# EAGLE board MP_PSU (EAGLE 9.7.0)
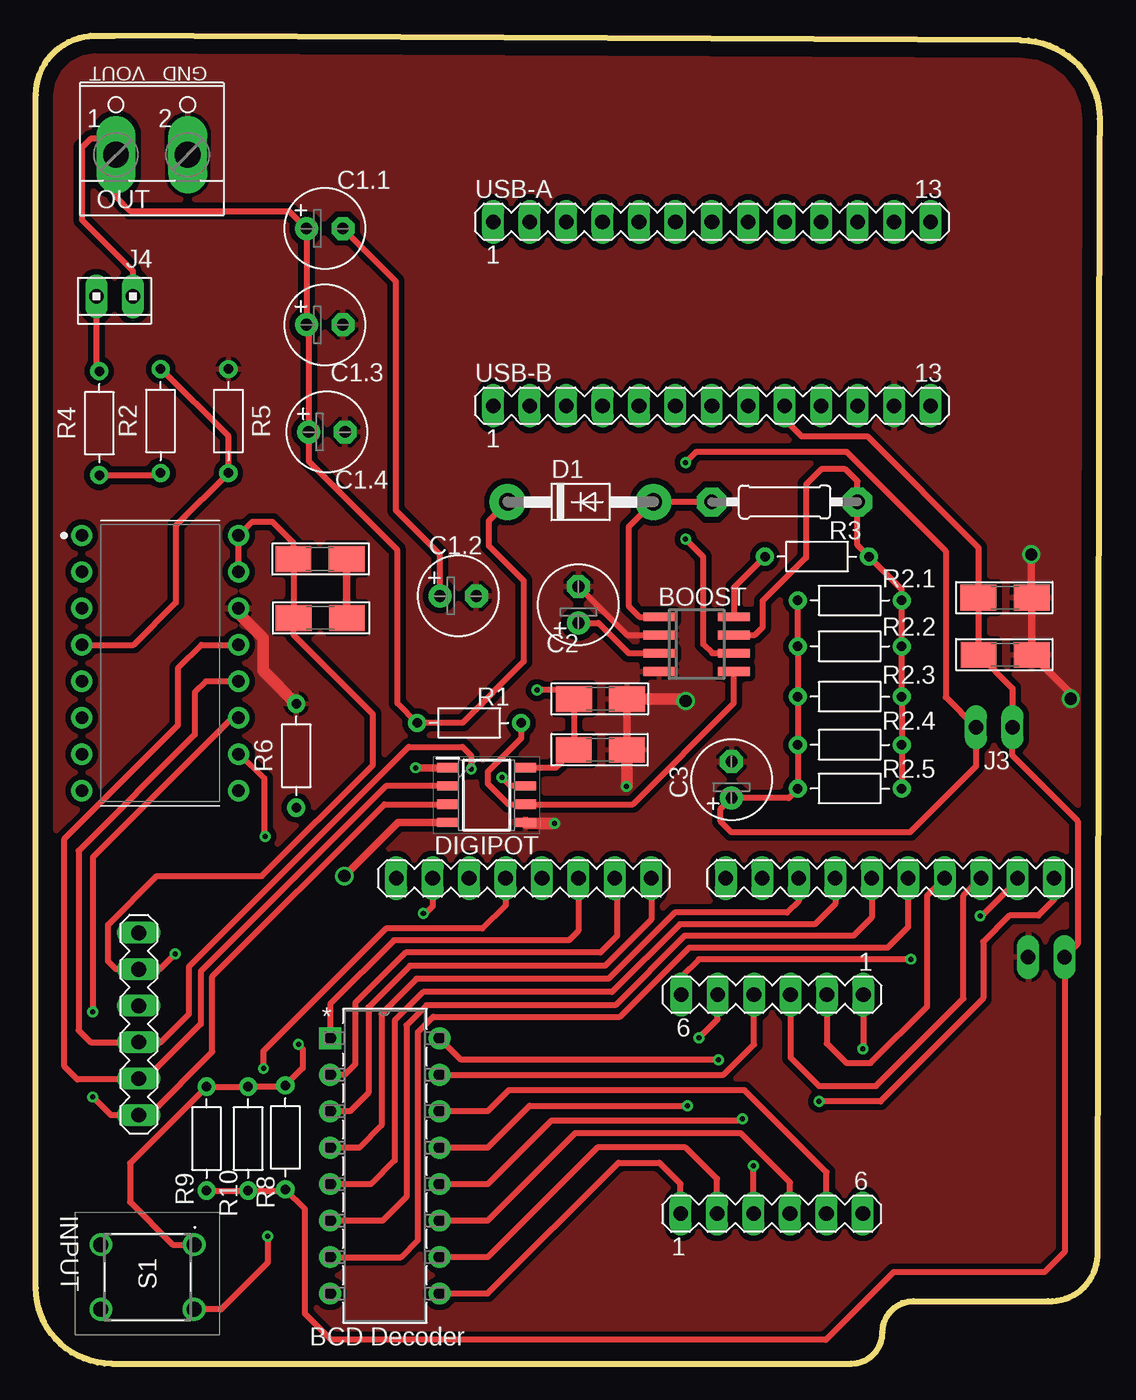
[diagram p0: board, top side]
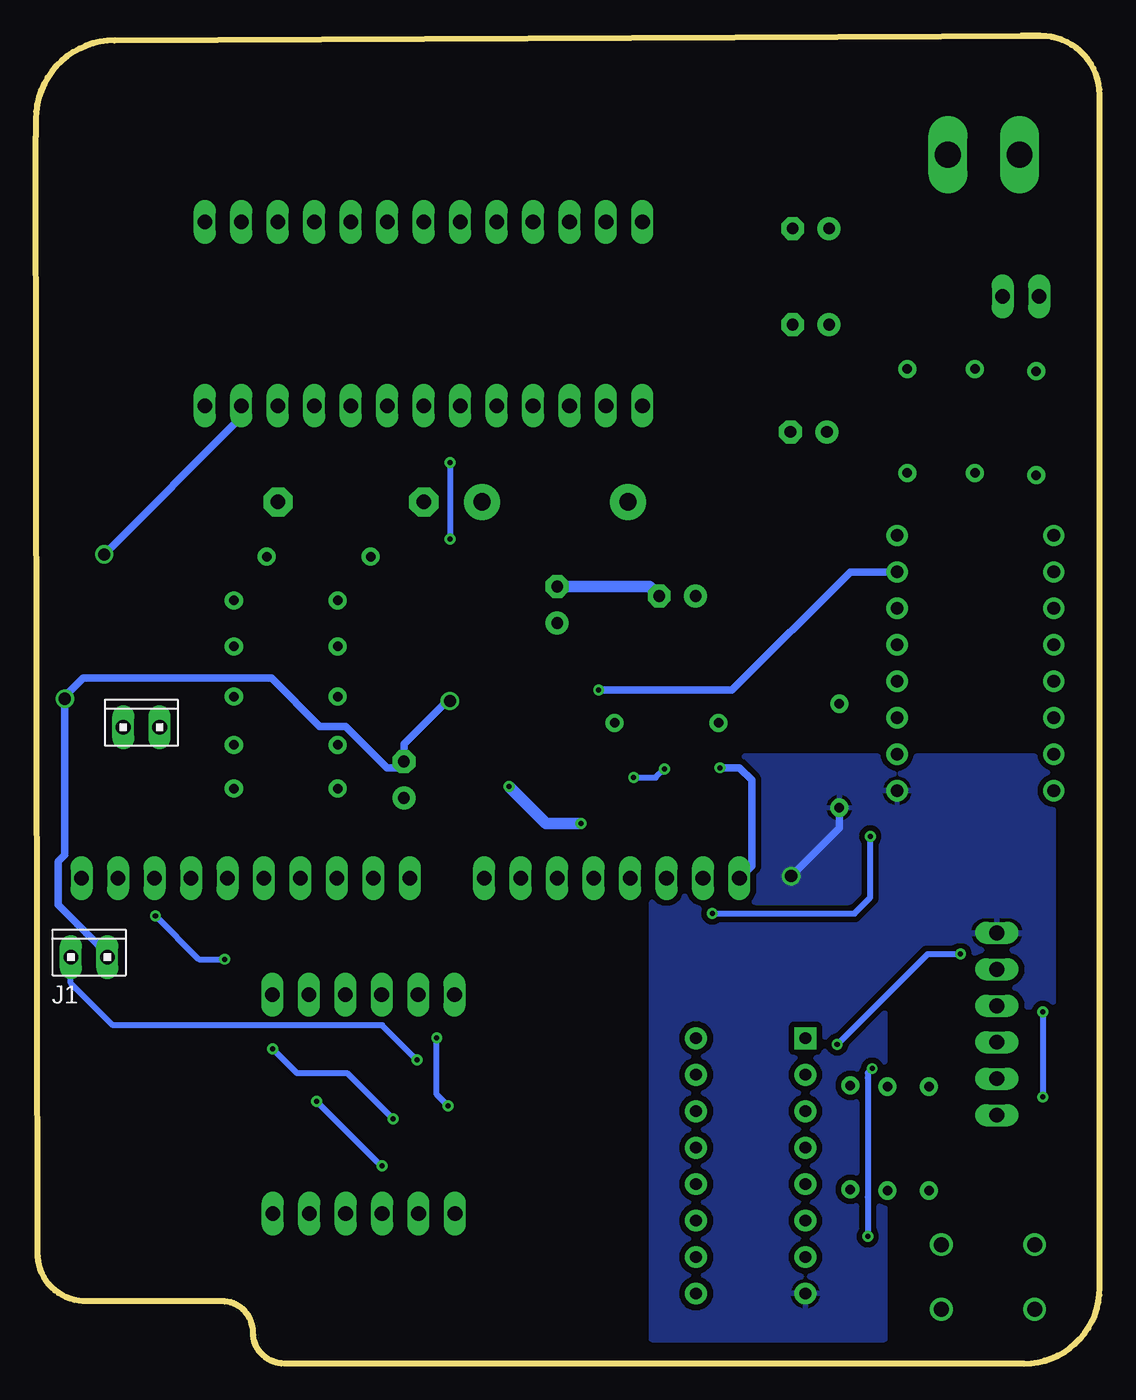
[diagram p1: board, bottom side, seen from below]

Size 74.1 x 92.48 mm. Coordinates in mm from the lower left corner, seen from the top.
Outline: 58.97,2.18 58.97,2.86
Outline: 73.96,7.49 arc-90 70.51,4.35
Outline: 70.51,4.35 60.28,4.35
Outline: 3.81,92.48 68.63,92.18 arc-90 74.1,86.7 74.1,85.49 73.96,7.49
Outline: 58.97,2.18 arc-90 61.15,4.35 70.51,4.35
Outline: 70.51,4.35 arc90 73.96,7.49
Outline: 58.97,2.18 arc-90 56.8,0 5.27,0 arc-90 0,5.27 0,88.37 arc-90 4.11,92.48 5.49,92.48
Copper layers (1*16): Top / Bottom
Stack-up Default Layer Stack: Top User Defined 0.035mm / Dielectric-1 User Defined 1.5mm / Bottom User Defined 0.035mm
Design rules "default *": minimum track width 16mil, minimum drill 0.02031875mm, track to track 16mil, track to pad 16mil, pad to pad 16mil, via to via 16mil, smd to smd 16mil, copper to edge 40mil, drill to drill 6mil, minimum pad ring 10mil, minimum via ring 8mil, stop-mask expansion 4mil, vias tented up to drill 0mil, thermal gap 10mil

## Footprints (pad centres in the part's own frame; a part is rotated, then mirrored left to right if it is on the bottom)
DIP1092W56P254L1905H432Q16B = drill 0.877 pad 1.477: 1 -5.46,8.89; 2 -5.46,6.35; 3 -5.46,3.81; 4 -5.46,1.27; 5 -5.46,-1.27; 6 -5.46,-3.81; 7 -5.46,-6.35; 8 -5.46,-8.89; 9 5.46,-8.89; 10 5.46,-6.35; 11 5.46,-3.81; 12 5.46,-1.27; 13 5.46,1.27; 14 5.46,3.81; 15 5.46,6.35; 16 5.46,8.89
SOIC8 = smd 0.6 x 2.2: 1 -1.905,-2.6; 2 -0.635,-2.6; 3 0.635,-2.6; 4 1.905,-2.6; 5 1.905,2.6; 6 0.635,2.6; 7 -0.635,2.6; 8 -1.905,2.6
E2,5-6 = drill 0.813 pad 1.6: + -1.27,0 | drill 0.813 pad 1.6 octagon: - 1.27,0
DO41-10 = drill 1.2 pad 2.5: A 5.08,0; C -5.08,0
C1206 = smd 2.5 x 1.8: 1 -1.85,0; 2 1.85,0
SOIC127P600X175-8N = smd 1.5 x 0.65: 1 -2.7,1.905; 2 -2.7,0.635; 3 -2.7,-0.635; 4 -2.7,-1.905; 5 2.7,-1.905; 6 2.7,-0.635; 7 2.7,0.635; 8 2.7,1.905
10X02MTA = drill 1.016 long: 1 1.27,0; 2 -1.27,0
MA08-1 = drill 1.016 long: 1 -8.89,0; 2 -6.35,0; 3 -3.81,0; 4 -1.27,0; 5 1.27,0; 6 3.81,0; 7 6.35,0; 8 8.89,0
MA10-1 = drill 1.016 long: 1 -11.43,0; 2 -8.89,0; 3 -6.35,0; 4 -3.81,0; 5 -1.27,0; 6 1.27,0; 7 3.81,0; 8 6.35,0; 9 8.89,0; 10 11.43,0
0207/10 = drill 1.016 pad 2.032 octagon: 1 -5.08,0; 2 5.08,0
W237-102 = drill 1.8 long: 1 -2.5,-1.27; 2 2.5,-1.27
RESAD724W46L381D178B = drill 0.66 pad 1.26: 1 -3.62,0; 2 3.62,0
TL1105AF160Q = drill 1.05 pad 1.575: 1 0,0; 2 0,-6.5; 3 4.5,0; 4 4.5,-6.5
MA06-1 = drill 1.016 long: 1 -6.35,0; 2 -3.81,0; 3 -1.27,0; 4 1.27,0; 5 3.81,0; 6 6.35,0
DIP16_300 = drill 0.813 pad 1.524 square: 1 -7.62,17.78 | drill 0.813 pad 1.524: 2 -7.62,15.24; 3 -7.62,12.7; 4 -7.62,10.16; 5 -7.62,7.62; 6 -7.62,5.08; 7 -7.62,2.54; 8 -7.62,0; 9 0,0; 10 0,2.54; 11 0,5.08; 12 0,7.62; 13 0,10.16; 14 0,12.7; 15 0,15.24; 16 0,17.78
MA13-1 = drill 1.016 long: 1 -15.24,0; 2 -12.7,0; 3 -10.16,0; 4 -7.62,0; 5 -5.08,0; 6 -2.54,0; 7 0,0; 8 2.54,0; 9 5.08,0; 10 7.62,0; 11 10.16,0; 12 12.7,0; 13 15.24,0

## Placement (x,y rotation side)
ADC  MCP3008  [DIP1092W56P254L1905H432Q16B]  8.66,48.8 0 top
BOOST  MC34063AD  [SOIC8]  46.02,50.11 270 top
C1.1  470uF  [E2,5-6]  20.12,79.07 0 top
C1.2  220uF  [E2,5-6]  29.41,53.47 0 top
C1.3  220uF  [E2,5-6]  20.12,72.36 0 top
C1.4  10uF  [E2,5-6]  20.27,64.9 0 top
C2  300pF  [E2,5-6]  37.8,52.86 90 top
C3  100uF  [E2,5-6]  48.46,40.67 90 top
D1  1N5819  [DO41-10]  37.95,60.02 0 top
DC1  0.1uF  [C1206]  19.81,51.94 0 top
DC2  0.1uF  [C1206]  19.78,56.04 0 top
DC3  0.1uF  [C1206]  39.32,46.3 180 top
DC5  0.1uF  [C1206]  67.51,53.35 180 top
DC6  0.1uF  [C1206]  67.52,49.38 180 top
DC-1206  0.1uF  [C1206]  39.32,42.76 180 top
DIGIPOT  MCP4162-104E_SN  [SOIC127P600X175-8N]  31.39,39.6 0 top
J1  EXPWR  [10X02MTA]  70.4,28.32 0 bottom
J2  p0  [MA08-1]  33.99,33.81 0 top
J3  [10X02MTA]  66.75,44.32 0 bottom
J4  [10X02MTA]  5.49,74.35 180 top
J6  p3  [MA10-1]  59.49,33.82 180 top
L1  18uH  [0207/10]  52.16,60.02 0 top
OUT  [W237-102]  8.08,85.47 0 top
R1  4.7k  [RESAD724W46L381D178B]  30.18,44.63 0 top
R2  330  [RESAD724W46L381D178B]  8.69,65.66 90 top
R2.1  1  [RESAD724W46L381D178B]  56.69,53.16 0 top
R2.2  1  [RESAD724W46L381D178B]  56.69,49.96 0 top
R2.3  1  [RESAD724W46L381D178B]  56.69,46.46 0 top
R2.4  1  [RESAD724W46L381D178B]  56.69,43.1 0 top
R2.5  1  [RESAD724W46L381D178B]  56.69,40.06 0 top
R3  180  [RESAD724W46L381D178B]  54.41,56.21 0 top
R4  3.3k  [RESAD724W46L381D178B]  4.42,65.51 90 top
R5  1k  [RESAD724W46L381D178B]  13.41,65.66 270 top
R6  [RESAD724W46L381D178B]  18.14,42.34 90 top
R8  1  [RESAD724W46L381D178B]  17.38,15.76 90 top
R9  10  [RESAD724W46L381D178B]  11.89,15.67 90 top
R10  10  [RESAD724W46L381D178B]  14.78,15.67 90 top
S1  TL1105AF160Q  [TL1105AF160Q]  11.03,8.28 270 top
SPI  spi  [MA06-1]  7.16,23.65 90 top
SV1  [MA06-1]  51.29,25.69 180 top
SV2  [MA06-1]  51.26,10.44 0 top
U1  BCD Decoder  [DIP16_300]  28.12,4.88 0 top
USB-A  [MA13-1]  47.09,79.53 0 top
USB-B  [MA13-1]  47.09,66.73 0 top

## Library data of the parts
ADC = IC_Data-Conversion; CATEGORY: IC_Data-Conversion; DESCRIPTION: IC ADC 10BIT SAR 16DIP; MANUFACTURER: Microchip Technology; MPN: MCP3008-I/P; OPERATINGTEMP: -40 to +85°C; PART_STATUS: Active; ROHS_COMPLIANT: Compliant; SUB-CATEGORY: A/D Converter
BOOST = mc34063
C1.1-C1.4 C2 C3 D1 DC1-DC3 DC5 DC6 DC-1206 L1 = BASIC_Components
DIGIPOT = MCP4162-104E_SN; DESCRIPTION: Digital Potentiometer 256 Step 100kOhm; HEIGHT: 1.75mm; MANUFACTURER_NAME: Microchip; MANUFACTURER_PART_NUMBER: MCP4162-104E/SN; MOUSER_PART_NUMBER: 579-MCP4162-104E/SN; MOUSER_PRICE-STOCK: https://www.mouser.co.uk/ProductDetail/Microchip-Technology-Atmel/MCP4162-104E-SN?qs=hH%252BOa0VZEiAyFbEnDIqKaA%3D%3D
J1 J3 J4 = con-amp
J2 J6 SPI = con-lstb; OC_FARNELL: unknown; OC_NEWARK: unknown
OUT = BASIC_Components; MPN: 237-102; OC_FARNELL: unknown; OC_NEWARK: 70K9898
R1 R2 R2.1-R2.5 R3-R6 R8-R10 = Resistor; CATEGORY: Resistor; SUB-CATEGORY: Fixed
S1 = TL1105AF160Q; DESCRIPTION: E-SWITCH - TL1105AF160Q - SWITCH, TACTILE SPST, 50mA, THROUGH HOLE; HEIGHT: 6.8mm; MANUFACTURER_NAME: E-Switch; MANUFACTURER_PART_NUMBER: TL1105AF160Q; MOUSER_PART_NUMBER: 612-TL1105A; MOUSER_PRICE-STOCK: https://www.mouser.co.uk/ProductDetail/E-Switch/TL1105AF160Q?qs=YXf4ACKMM4wdc4witUH7eQ%3D%3D
SV1 SV2 USB-A USB-B = con-lstb
U1 = 2023-03-22_10-19-04_Library; COPYRIGHT: Copyright (C) 2023 Ultra Librarian. All rights reserved.; MANUFACTURER_PART_NUMBER: SN7448N; MFR_NAME: Texas Instruments

## Nets
B-VIN: BOOST.6 C3.+ J3.1 R2.1.1 R2.2.1 R2.3.1 R2.4.1 R2.5.1
DCD-A: J6.5 U1.7
DCD-B: J2.6 U1.1
DCD-C: J2.7 U1.2
DCD-D: J6.6 U1.6
DCD-LT: J2.8 U1.3
DCD-RBI: J6.7 U1.5
DCD-RBO: J6.8 U1.4
DGND: ADC.9 DIGIPOT.4 R6.1 SPI.6 U1.8
DIGIPOT: BOOST.5 DIGIPOT.6 R1.2
GND: ADC.14 BOOST.2 BOOST.4 C1.2.- C1.3.- C1.4.- C2.- C3.- DC3.1 DC5.1 DC6.1 DC-1206.1 DIGIPOT.5 J1.1 OUT.2 R5.1 R6.2 USB-B.12
GND1: DC1.2 DC2.2
INT0: J2.4 S1.3
LED-1: J6.2 SV1.6
LED-2: J6.3 SV1.3
LED-3: J6.4 SV1.2
LED-A: SV1.5 U1.13
LED-B: SV1.1 U1.12
LED-C: SV2.4 U1.11
LED-D: SV2.2 U1.10
LED-DP: J6.1 SV2.3
LED-E: SV2.1 U1.9
LED-F: SV1.4 U1.15
LED-G: SV2.5 U1.14
MISO: ADC.12 DIGIPOT.7 SPI.3
MOSI: ADC.11 DIGIPOT.3 SPI.1
N$1: BOOST.7 L1.2 R2.1.2 R2.2.2 R2.3.2 R2.4.2 R2.5.2 R3.2
N$2: BOOST.8 R3.1
N$3: BOOST.1 D1.A L1.1
N$5: BOOST.3 C2.+
N$7: J4.1 R4.2
N$9: C1.1.- C1.2.+
N$10: R2.1 R4.1
N$11: ADC.4 R2.2 R5.2
SCK: ADC.13 DIGIPOT.2 SPI.2
SS: SPI.4
SS0: DIGIPOT.1 J2.1
SS1: ADC.10 J2.2
VDDR: ADC.15 ADC.16 DC1.1 DC2.1 DC3.2 DC-1206.2 DIGIPOT.8 R8.2 R9.2 R10.2 S1.1 SPI.5
VIN: DC5.2 DC6.2 J1.2 J3.2 R8.1 R9.1 R10.1 U1.16 USB-B.9
VOUT: C1.1.+ C1.3.+ C1.4.+ D1.C J4.2 OUT.1 R1.1

## Tracks (layer width: path | path; a pad name or v marks a point on that pad's centre or on a via)
B-VIN  (via drill 0.35)
  Top 0.406: R2.1.1 R2.2.1 R2.3.1 R2.4.1 R2.5.1 53.07,40.02 52.45,39.4 C3.+ 47.7,38.63 47.7,37.77 48.46,37.01 60.9,37.01 65.48,41.59 J3.1 63.38,46.42 63.38,56.61 56.47,63.53 46.02,63.53 v45.26,62.76 | BOOST.6 47.12,49.48 46.48,50.11 46.48,56.21 v45.26,57.43
  Bottom 0.406: v45.26,62.76 v45.26,57.43
DCD-A
  Top 0.406: U1.7 25.43,7.42 26.62,8.61 26.62,23.1 27.67,24.16 40.7,24.16 45.53,28.98 59.33,28.98 60.76,30.41 J6.5
DCD-B
  Top 0.406: J2.6 37.8,30.15 37.13,29.49 24.94,29.49 20.5,25.05 U1.1
DCD-C
  Top 0.406: J2.7 40.49,33.65 40.49,29.79 39.32,28.63 25.76,28.63 22.25,25.12 22.25,20.85 21.52,20.12 U1.2
DCD-D
  Top 0.406: J6.6 58.22,31.07 56.95,29.79 45.19,29.79 40.36,24.97 27.21,24.97 25.81,23.56 25.81,11.61 24.16,9.96 U1.6
DCD-LT
  Top 0.406: U1.3 21.87,17.58 23.16,18.87 23.16,24.82 26.06,27.71 39.66,27.71 42.88,30.93 J2.8
DCD-RBI
  Top 0.406: J6.7 55.68,32.03 54.25,30.61 44.85,30.61 40.13,25.88 26.97,25.88 24.99,23.9 24.99,14.15 23.35,12.5 U1.5
DCD-RBO
  Top 0.406: J6.8 53.14,32.24 52.32,31.42 44.52,31.42 39.89,26.8 26.52,26.8 24.08,24.36 24.08,16.59 22.53,15.04 U1.4
DGND  (via drill 0.85)
  Top 0.508: DIGIPOT.4 25.22,37.69 v21.49,33.96
  Bottom 0.508: v21.49,33.96 18.14,37.31 R6.1
  pour Bottom: 31.39,42.49 3.05,42.49 3.05,24.66 14.78,24.66 14.78,1.5 31.39,1.5
DIGIPOT
  Top 0.406: BOOST.5 48.62,46 41.58,38.96 DIGIPOT.6 32.92,38.96 31.47,40.41 31.47,41.23 33.8,43.55 R1.2
GND  (via drill 0.35, 0.85)
  Top 0.406: C2.- 41.17,50.75 BOOST.2
  Top 0.508: v72.09,46.3 72.09,46.66 DC6.1 DC5.1 69.34,53.37 v69.34,56.36 | DC-1206.1 DC3.1
  Top 0.813: 45.26,46.37 v45.26,46.15 45.12,46.3 DC3.1 | DC-1206.1 41.17,40.23 v41.15,40.21 | v36.12,37.62 34.17,37.62 DIGIPOT.5 | R6.2 15.82,48.28 15.82,50.56 14.12,52.26 ADC.14
  Bottom 0.508: J1.1 69.13,28.55 72.53,31.96 72.53,34.99 72.09,35.43 v72.09,46.3 72.09,46.46 70.79,47.75 57.68,47.75 54.33,44.39 52.54,44.39 49.62,41.48 48.92,41.48 C3.- 48.46,43.15 45.47,46.15 v45.26,46.15 | v69.34,56.36 59.79,65.91 USB-B.12
  Bottom 0.813: C2.- 31.36,54.14 C1.2.- | v41.15,40.21 38.56,37.62 v36.12,37.62
  pour Top: 57.03,0.31 57.35,0.38 57.66,0.51 57.95,0.69 58.2,0.9 58.42,1.16 58.59,1.44 58.72,1.75 58.8,2.08 58.83,2.41 58.98,2.41 59,2.7 59,2.7 59,2.7 59.07,2.98 59.07,2.98 59.07,2.98 59.18,3.24 59.18,3.24 59.33,3.49 59.33,3.49 59.33,3.49 59.51,3.71 59.51,3.71 59.73,3.89 59.73,3.89 59.73,3.89 59.73,3.89 59.98,4.04 60.24,4.15 60.24,4.15 60.24,4.15 60.52,4.22 60.52,4.22 60.52,4.22 60.81,4.24 70.1,4.24 70.64,4.28 71.17,4.38 71.68,4.56 72.16,4.79 72.61,5.09 73.01,5.45 73.37,5.85 73.67,6.3 73.91,6.78 74.08,7.29 74.18,7.82 74.22,8.36 74.22,86.39 74.18,87.1 74.05,87.81 73.83,88.49 73.54,89.15 73.17,89.76 72.72,90.33 72.22,90.83 71.65,91.28 71.04,91.65 70.38,91.94 69.7,92.16 68.99,92.29 68.28,92.33 4.11,92.33 3.56,92.29 3.01,92.18 2.48,92 1.98,91.76 1.52,91.45 1.1,91.08 0.73,90.66 0.42,90.2 0.17,89.69 -0.01,89.17 -0.12,88.62 -0.15,88.06 -0.15,86.44 -0.08,86.37 -0.04,86.34 -0.04,86.34 -0.04,86.34 -0.02,86.31 -0.02,86.31 -0.01,86.27 -0.01,86.27 -0.01,86.25 0,86.23 0,5.61 0.04,4.97 0.15,4.34 0.35,3.72 0.61,3.13 0.94,2.58 1.34,2.08 1.8,1.62 2.3,1.22 2.86,0.89 3.44,0.63 4.06,0.43 4.69,0.32 5.33,0.28 56.69,0.28
GND1
  Top 0.508: DC2.2 21.63,51.97 DC1.2
INT0  (via drill 0.35)
  Top 0.406: J2.4 32.72,31.93 31.09,30.3 24.38,30.3 15.85,21.77 v15.85,20.55 | v16.15,8.86 16.15,7.04 12.9,3.78 S1.3
  Bottom 0.406: v15.85,20.55 16.15,20.24 16.15,19.91 16.14,19.89 16.14,11.62 16.15,11.61 v16.15,8.86
LED-1  (via drill 0.35)
  Top 0.406: v60.96,28.17 46.18,28.17 44.94,26.93 SV1.6 | v65.78,31.18 65.9,31.18 68.38,33.66 J6.2
  Bottom 0.406: v65.78,31.18 62.76,28.17 v60.96,28.17
LED-2
  Top 0.406: SV1.3 52.56,21.33 54.56,19.33 58.52,19.33 64.62,25.43 64.62,32.6 J6.3
LED-3
  Top 0.406: SV1.2 55.1,22.29 56.46,20.93 58.14,20.93 62.08,24.87 62.08,32.6 J6.4
LED-A  (via drill 0.35)
  Top 0.406: U1.13 31.47,15.04 34.39,17.96 v45.39,17.96 | v46.18,22.68 47.48,23.99 SV1.5
  Bottom 0.406: v45.39,17.96 46.18,18.75 v46.18,22.68
LED-B  (via drill 0.35)
  Top 0.406: U1.12 31.47,12.5 35.91,16.94 49.12,16.94 v49.23,17.04 | SV1.1 57.64,21.95 v57.61,21.92
  Bottom 0.406: v57.61,21.92 55.93,20.24 52.43,20.24 v49.23,17.04
LED-C
  Top 0.406: U1.11 31.47,9.96 37.57,16.06 49.1,16.06 52.53,12.63 SV2.4
LED-D
  Top 0.406: U1.10 31.47,7.42 39.11,15.06 45.26,15.06 47.45,12.88 SV2.2
LED-DP  (via drill 0.35)
  Top 0.406: v54.56,18.26 58.83,18.26 65.99,25.43 65.99,29.39 67.82,31.22 69.84,31.22 70.92,32.3 J6.1 | SV2.3 v49.99,13.77
  Bottom 0.406: v54.56,18.26 50.07,13.77 v49.99,13.77
LED-E
  Top 0.406: U1.9 31.47,4.88 40.59,14 43.43,14 44.91,12.52 SV2.1
LED-F
  Top 0.406: U1.15 47.91,20.12 50.02,22.23 SV1.4
LED-G
  Top 0.406: SV2.5 55.07,13.33 49.37,19.03 32.93,19.03 31.47,17.58 U1.14
MISO  (via drill 0.35)
  Top 0.406: DIGIPOT.7 33.05,40.23 v32.46,40.82 | ADC.12 11.83,47.53 11.07,46.76 11.07,43.81 2.97,35.72 2.97,23.21 3.81,22.38 SPI.3 8.69,22.38 10.67,24.36 10.67,27.66 25.96,42.95 29.72,42.95 30.33,42.34 v30.33,41.43
  Bottom 0.406: v32.46,40.82 30.94,40.82 v30.33,41.43
MOSI  (via drill 0.35)
  Top 0.406: v3.96,18.57 5.23,17.3 SPI.1 7.88,17.3 12.29,21.72 12.29,26.98 24.27,38.96 DIGIPOT.3 | ADC.11 13.68,44.99 3.96,35.26 v3.96,24.51
  Bottom 0.406: v3.96,24.51 v3.96,18.57
N$1
  Top 0.406: R2.5.2 R2.4.2 R2.3.2 R2.2.2 R2.1.2 60.31,53.92 R3.2 57.24,57 L1.2 57.24,61.46 56.39,62.31 54.71,62.31 53.64,61.24 53.64,56.14 50.64,53.13 50.64,51.31 50.07,50.75 BOOST.7
N$2
  Top 0.406: R3.1 48.62,54.05 BOOST.8
N$3
  Top 0.406: L1.1 D1.A 41.29,58.28 41.29,52.78 42.05,52.02 BOOST.1
N$5
  Top 0.406: C2.+ 39.19,51.59 41.29,49.48 BOOST.3
N$7
  Top 0.406: J4.1 4.22,69.33 R4.2
N$9
  Top 0.406: C1.2.+ 28.14,56.36 25.08,59.42 25.08,75.37 C1.1.-
N$10
  Top 0.406: R4.1 8.53,61.89 R2.1
N$11
  Top 0.406: R2.2 8.72,69.28 13.41,64.59 R5.2 9.75,58.38 9.75,53.01 6.81,50.07 ADC.4
SCK
  Top 0.406: 7.11,19.79 2.9,19.79 1.98,20.7 1.98,36.55 9.91,44.48 9.91,48.44 11.53,50.07 ADC.13 | 7.11,19.79 SPI.2 | 7.11,19.79 7.62,19.79 11.48,23.65 11.48,27.32 24.39,40.23 DIGIPOT.2
SS0  (via drill 0.35)
  Top 0.508: v26.46,41.5 DIGIPOT.1
  Bottom 0.508: v26.46,41.5 25.08,41.5 24.23,40.65 24.23,34.67 J2.1
SS1  (via drill 0.35)
  Top 0.406: J2.2 27.64,31.85 27.14,31.36 v26.99,31.36 | ADC.10 14.24,42.45 15.92,40.77 15.92,36.78 v15.98,36.73
  Bottom 0.406: v26.99,31.36 17.08,31.36 15.98,32.46 v15.98,36.73
VDDR  (via drill 0.35)
  Top 0.406: DIGIPOT.8 36.21,41.5 DC-1206.2 DC3.2 36.86,46.91 v34.9,46.91 | ADC.15 ADC.16 15.08,58.65 16.46,58.65 17.93,57.17 DC2.1 17.96,56.02 DC1.1 17.96,50.74 23.49,45.22 23.49,41.71 15.74,33.96 8.42,33.96 5.03,30.57 5.03,28.02 5.59,27.46 SPI.5 8.62,27.46 v9.69,28.54 | v18.29,22.22 18.59,21.92 18.59,20.59 R8.2 17.29,19.29 R10.2 R9.2 6.55,13.96 6.55,11.25 9.52,8.28 S1.1
  Bottom 0.406: v18.29,22.22 11.99,28.53 v9.7,28.53 v9.69,28.54
  Bottom 0.508: v34.9,46.91 25.6,46.91 17.37,55.15 ADC.15
VIN  (via drill 0.35)
  Top 0.406: R9.1 R10.1 17.29,12.05 R8.1 18.75,10.77 18.75,3.48 20.57,1.65 55.02,1.65 59.74,6.38 70.26,6.38 71.67,7.79 J1.2 72.58,29.23 72.58,37.79 68.02,42.35 J3.2 68.02,47.03 DC6.2 DC5.2 65.66,56.84 57.91,64.59 53.34,64.59 52.17,65.76 USB-B.9 | v47.55,21.16 29.62,21.16 U1.16
  Bottom 0.406: v47.55,21.16 47.58,21.16 49.99,23.56 68.74,23.56 71.67,26.49 J1.2
VOUT
  Top 0.406: J4.2 6.76,76.12 3.2,79.68 3.2,84.71 3.81,85.32 4.46,85.32 OUT.1 5.58,81.27 6.55,80.29 17.63,80.29 C1.1.+ C1.3.+ 19,72.21 C1.4.+ 19,62.85 25.18,56.67 25.18,46 R1.1 29.72,44.63 33.99,48.89 33.99,54.53 31.55,56.97 31.55,58.7 D1.C

## Text on the board
tNames: VOUT | GND | INPUT